# Altium PCB LED Strip Board 2.PcbDoc
Units mil, origin at the board's own origin, x right, y up, seen from the top; angles counter-clockwise.
Board outline 4495.54 x 2410.41 mil, 2 copper layers (Top Layer, Bottom Layer); 44 components, 40 nets, 148 pads, 28 vias.
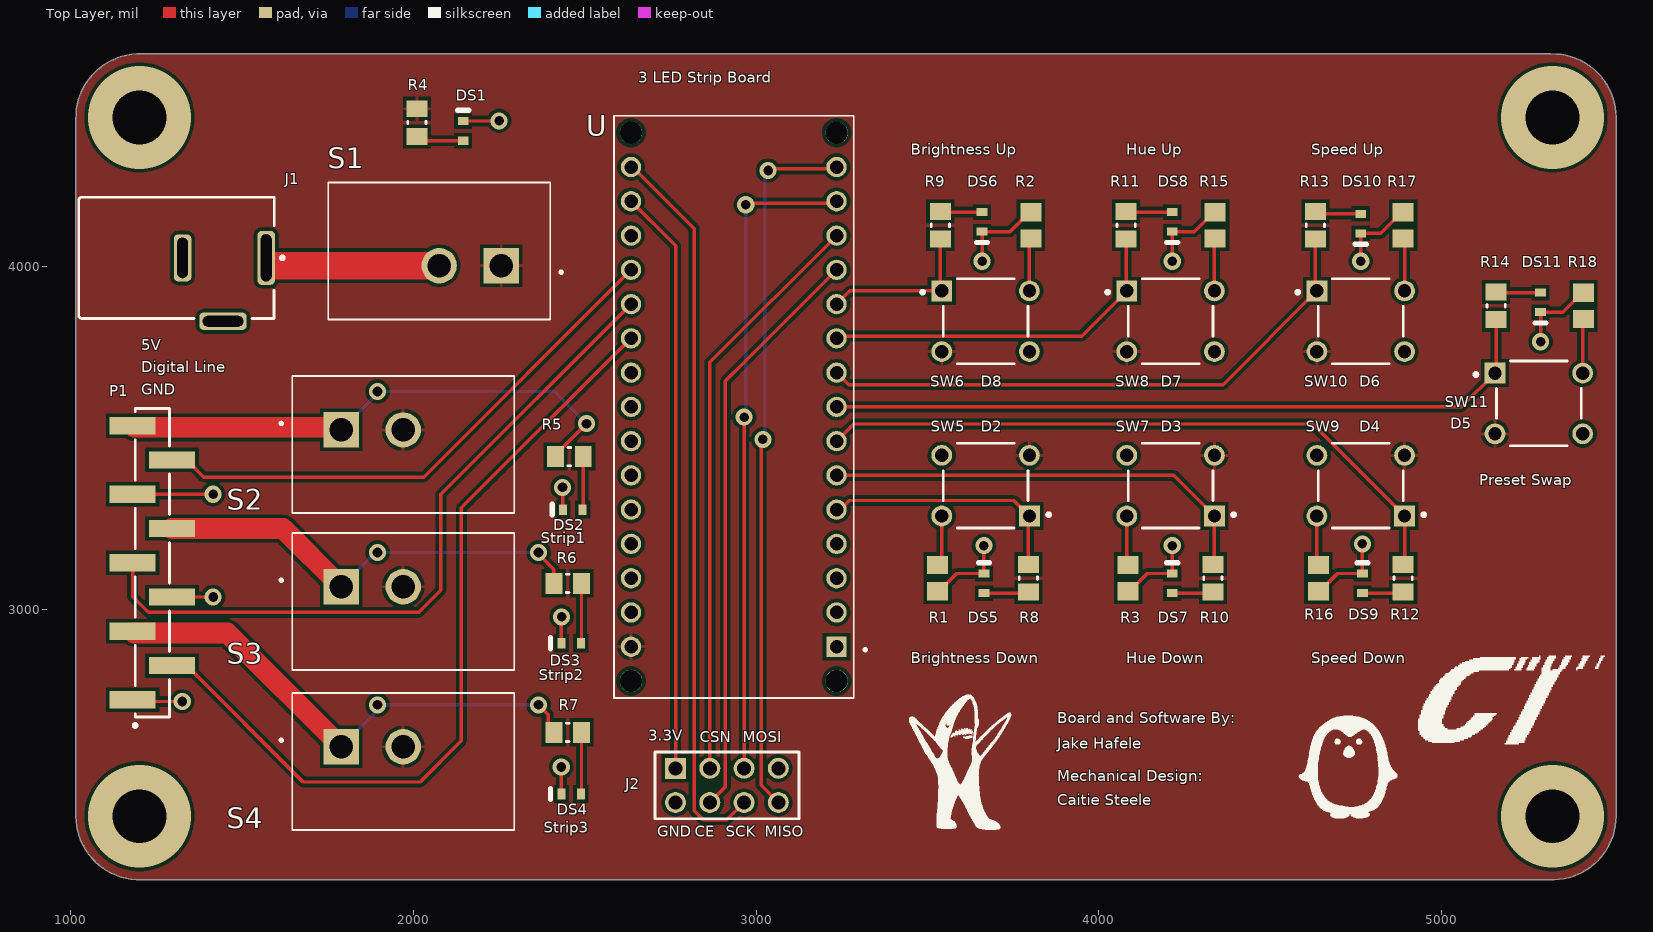
[diagram p0: Top Layer view]
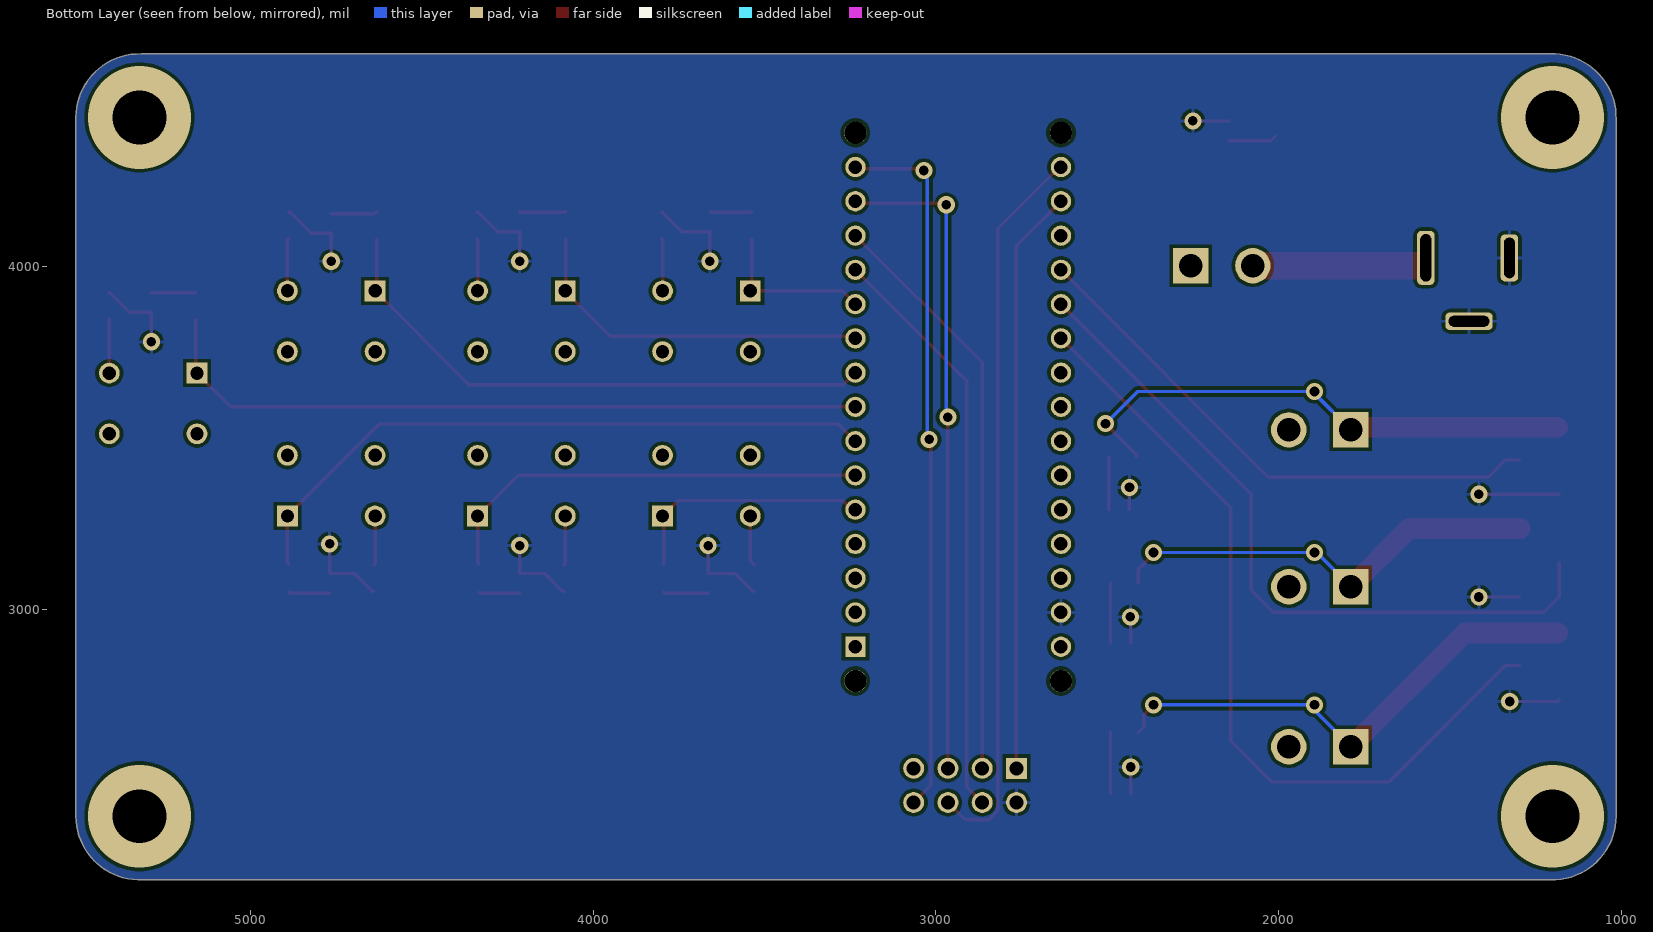
[diagram p1: Bottom Layer view, seen from below]

## Layer stack, top to bottom
Top Solder: solder mask 0.4, Solder Resist, Dk 3.5
Top Layer: signal copper 1.4
Dielectric 1: dielectric 12.6, FR-4, Dk 4.8
Bottom Layer: signal copper 1.4
Bottom Solder: solder mask 0.4, Solder Resist, Dk 3.5

## Board outline
1205.01,2209.8 cw(c1200,2395) 1014.73,2395 1014.73,4429.63 1014.81,4429.71 cw(c1200,4435) 1206.17,4620.17 1206.21,4620.2 5319.99,4620.2 cw(c5325,4435) 5510.27,4435 5510.27,2395 cw(c5325,2395) 5330.29,2209.81

## Design rules (kind name [scope] priority, off if disabled: settings)
Clearance [All] p1: gap=10 ignorepadtopadclearanceinfootprint=FALSE except(0: Arc-Hole Track-Hole SMDPad-Hole THPad-Hole Via-Hole Fill-Hole Poly-Hole Region-Hole Text-Hole)
PolygonConnect [All] p1: connectstyle=Relief reliefconductorwidth=10 reliefentries=4 polygonreliefangle="90 Angle" airgapwidth=10
RoutingVias [All] p1: holewidth=28 width=50 viastyle="Through Hole" minholewidth=28 minwidth=50 maxholewidth=28 maxwidth=50
SolderMaskExpansion [All] p1: expansion=4 istentingtop=FALSE
Width [All] p1: maxlimit=10 minlimit=10 preferedwidth=10
30 further rules are at their usual default settings.

## Components (designator, comment, footprint, x,y, rotation, side; value= is the part's Value field where it differs from the comment)
DS1 "Red LED" VISH-TLMS1000_V 2145,4395.39 r90 top
DS2 "Red" VISH-TLMS1000_V 2465,3290 r180 top
DS3 "Red" VISH-TLMS1000_V 2460,2900 r180 top
DS4 "Red" VISH-TLMS1000_V 2460,2460 r180 top
DS5 "Red LED" VISH-TLMS1000_V 3665,3075 r90 top
DS6 "Red LED" VISH-TLMS1000_V 3659.11,4130 r270 top
DS7 "Red LED" VISH-TLMS1000_V 4215,3075 r90 top
DS8 "Red LED" VISH-TLMS1000_V 4215,4130 r270 top
DS9 "Red LED" VISH-TLMS1000_V 4770,3075 r90 top
DS10 "Red LED" VISH-TLMS1000_V 4765,4125 r270 top
DS11 "Red LED" VISH-TLMS1000_V 5290,3895 r270 top
J1 "KLDX-0202-A" KYCN-KLDX-0202-A_V 1325.91,4025 r180 top
J2 "NRF24l01 Connect" SMTC-SSW-104-01-X-D 2765,2535 r0 top
P1 "LED Strip Connectors" SMTC-TSM-109-01-X-SV 1237.52,3135 r90 top
R1 "10k" RESC2013X70X40ML20T20 3530,3090 r270 top
R2 "10k" RESC2013X70X40ML20T20 3802.15,4120 r90 top
R3 "10k" RESC2013X70X40ML20T20 4086.24,3090 r270 top
R4 "1k" RESC2013X60X30ML20T20 2010,4420 r90 top
R5 "1k" RESC2013X60X30ML20T20 2455.02,3445 r180 top
R6 "1k" RESC2013X60X30ML20T20 2450.02,3075 r180 top
R7 "1k" RESC2013X60X30ML20T20 2450.02,2640 r180 top
R8 "1k" RESC2013X60X30ML20T20 3795,3090 r90 top
R9 "1k" RESC2013X60X30ML20T20 3537.85,4120 r270 top
R10 "1k" RESC2013X60X30ML20T20 4333.76,3090 r90 top
R11 "1k" RESC2013X60X30ML20T20 4080,4120 r270 top
R12 "1k" RESC2013X60X30ML20T20 4888.76,3090 r90 top
R13 "1k" RESC2013X60X30ML20T20 4632.85,4120 r270 top
R14 "1k" RESC2013X60X30ML20T20 5160,3885 r270 top
R15 "10k" RESC2013X70X40ML20T20 4340,4120 r90 top
R16 "10k" RESC2013X70X40ML20T20 4641.24,3090 r270 top
R17 "10k" RESC2013X70X40ML20T20 4888.76,4120 r90 top
R18 "10k" RESC2013X70X40ML20T20 5415,3885 r90 top
S1 "GF-123-0054" SW_GF-123-0054 2075,4045 r180 top
S2 "GF-123-0054" SW_GF-123-0054 1970,3480 r0 top
S3 "GF-123-0054" SW_GF-123-0054 1970,3022.09 r0 top
S4 "GF-123-0054" SW_GF-123-0054 1970,2555 r0 top
SW5 "Button" FP-1825910-2-0 3670,3360 r180 top
SW6 "Button" FP-1825910-2-0 3670,3840 r0 top
SW7 "Button" FP-1825910-2-0 4210,3360 r180 top
SW8 "Button" FP-1825910-2-0 4210,3840 r0 top
SW9 "Button" FP-1825910-2-0 4765,3360 r180 top
SW10 "Button" FP-1825910-2-0 4765,3840 r0 top
SW11 "Button" FP-1825910-2-0 5285,3600 r0 top
U "A000005" MODULE_A000005 2935,3590 r180 top

## Footprints (in the part's own frame and the unit in brackets; to place one, negate y for a bottom-side part, rotate by r counter-clockwise, add the part's x,y. Pads: shape width x height; smd on the part's side, far side on the other; paste and mask are expansions set on the pad)
FP-1825910-2-0 [mm]
  rect 1.54x1.54 hole 0.99 paste-1000 mask+0: 1(-3.25,2.25)
  round 1.54 hole 0.99 paste-1000 mask+0: 2(3.25,2.25) 3(-3.25,-2.25) 4(3.25,-2.25)
  silkscreen extent -4.8,-3.15 3.15,3.15, body extent -4.12,-3.24 4.12,3.24, height 0.25
KYCN-KLDX-0202-A_V [mm] "Power Jack, 3-Leads, Body 14.5x9mm"
  rrect50% 1.3x4 hole 0.8 slot 3.5 at 90 deg: 1(-6.2,0)
  rrect50% 1.3x3.5 hole 0.8 slot 3 at 90 deg: 2(0,0)
  rrect50% 3.5x1.3 hole 0.8 slot 3 at 0 deg: 3(-3,4.7)
  silkscreen extent -7.53,-4.5 7.7,4.5, body extent -6.8,-4.5 7.7,4.9, height 10.8
MODULE_A000005 [mm]
  rect 1.508x1.508 hole 1: 1(-7.62,17.78)
  round 1.508 hole 1: 2(-7.62,15.24) 3(-7.62,12.7) 4(-7.62,10.16) 5(-7.62,7.62) 6(-7.62,5.08) 7(-7.62,2.54) 8(-7.62,0) 9(-7.62,-2.54) 10(-7.62,-5.08) 11(-7.62,-7.62) 12(-7.62,-10.16) 13(-7.62,-12.7) 14(-7.62,-15.24) 15(-7.62,-17.78) 16(7.62,-17.78) 17(7.62,-15.24) 18(7.62,-12.7) 19(7.62,-10.16) 20(7.62,-7.62) 21(7.62,-5.08) 22(7.62,-2.54) 23(7.62,0) 24(7.62,2.54) 25(7.62,5.08) 26(7.62,7.62) 27(7.62,10.16) 28(7.62,12.7) 29(7.62,15.24) 30(7.62,17.78)
  round 1.651 hole 1.651 unplated: ""(-7.62,20.32) ""(-7.62,-20.32) ""(7.62,20.32) ""(7.62,-20.32)
  silkscreen extent -9.85,-21.59 8.89,21.59
RESC2013X60X30ML20T20 [mm] "Chip Resistor, 2-Leads, Body 2.00x1.25mm, IPC Low Density"
  rect 1.25x1.55 smd: 1(-1.025,0) 2(1.025,0)
  silkscreen extent -0.1,-0.67 0.1,0.67, body extent -1.1,-0.72 1.1,0.72, height 0.6
RESC2013X70X40ML20T20 [mm] "Chip Resistor, 2-Leads, Body 2.00x1.25mm, IPC Low Density"
  rect 1.35x1.55 smd: 1(-0.975,0) 2(0.975,0)
  body extent -1.1,-0.72 1.1,0.72, height 0.7
SMTC-SSW-104-01-X-D [mm] "SQ Post Socket, 2x4 Pins, Vertical, 2.54mm Pitch, Female"
  rect 1.55x1.55 hole 1.04: 1(0,0)
  round 1.55 hole 1.04: 2(0,-2.54) 3(2.54,0) 4(2.54,-2.54) 5(5.08,0) 6(5.08,-2.54) 7(7.62,0) 8(7.62,-2.54)
  silkscreen extent -1.53,-3.74 9.15,1.2, body extent -1.52,-3.75 9.14,1.21, height 8.51
SMTC-TSM-109-01-X-SV [mm] "Single Row SMT Assembly, 9 Pins, Vertical, 2.54mm Pitch, Male"
  rect 1.27x3.43 smd: 1(-10.16,1.46) 2(-7.62,-1.46) 3(-5.08,1.46) 4(-2.54,-1.46) 5(0,1.46) 6(2.54,-1.46) 7(5.08,1.46) 8(7.62,-1.46) 9(10.16,1.46)
  silkscreen extent -12.19,-1.27 11.43,1.4, body extent -11.43,-2.64 11.43,2.64, height 9.65
SW_GF-123-0054 [mm]
  rect 2.625x2.625 hole 1.75: 1(-4.6,1.09)
  round 2.625 hole 1.75: 2(0,1.09)
  silkscreen extent -9.14,-5.08 8.23,5.08, body extent -8.23,-5.08 8.23,5.08, height 14.96
VISH-TLMS1000_V [mm] "SMD, 2-Leads, Body 0.8x1.6mm"
  rect 0.6x0.8 smd: 1(-0.725,0) 2(0.725,0)
  silkscreen extent 1.52,-0.4 1.52,0.4, body extent -0.8,-0.4 0.8,0.4, height 0.65

## Part data
DS1 DS5 DS6 DS7 DS8 DS9 DS10 DS11: library part CMP-2000-07254-1, "Low Current LED, 40 mW, 1.8 V, -40 to 100 degC, 2-Pin SMD (0603), RoHS, Tape and Reel", Forward Current If=2mA, Forward Voltage=1.8V, LED Colour=Red, Manufacturer=Vishay, Package Description="2-Pin Surface Mount Device, Body 1.6 x 0.8 mm", Package Reference=TLMS1000, Automotive Qualification Standard=AEC-Q100, Bulb Size=1.6mmx0.8mm, Datasheet URL=https://datasheet.ciiva.com/5798/1698881-5798337.pdf, Datasheet Version="Rev. 1.7, 02/2011", LED Mounting=SMD, Lens Shape=Rectangular, Luminous Intensity=4mcd, Manufacturer URL=http://www.vishay.com/, Mounting Technology=SurfaceMount, MSL=MSL2-1year, Packaging=CutTape, Product Range=-, SVHC=ToBeAdvised, Viewing Angle=80°, Wavelength Typ=636nm
DS2 DS3 DS4: library part CMP-2000-07254-1, "Low Current LED, 40 mW, 1.8 V, -40 to 100 degC, 2-Pin SMD (0603), RoHS, Tape and Reel", Forward Current If=2mA, Forward Voltage=1.8V, Manufacturer=Vishay, Package Description="2-Pin Surface Mount Device, Body 1.6 x 0.8 mm", Package Reference=TLMS1000, Automotive Qualification Standard=AEC-Q100, Bulb Size=1.6mmx0.8mm, Datasheet URL=https://datasheet.ciiva.com/5798/1698881-5798337.pdf, Datasheet Version="Rev. 1.7, 02/2011", LED Colour=Red, LED Mounting=SMD, Lens Shape=Rectangular, Luminous Intensity=4mcd, Manufacturer URL=http://www.vishay.com/, Mounting Technology=SurfaceMount, MSL=MSL2-1year, Packaging=CutTape, Product Range=-, SVHC=ToBeAdvised, Viewing Angle=80°, Wavelength Typ=636nm
J1: library part CMP-1673-00001-5, "DC Power Jack, 24 V, 3.5 A, -25 to 85 degC, 3-Pin THD, RoHS", Colour=Black, Current Rating="3.5 A", Manufacturer=Kycon, Max Operating Temperature="85 degC", Min Operating Temperature="-25 degC", Package Quantity=500, Voltage Rating="24 V", ComponentLink1Description="Manufacturer URL", ComponentLink1URL=http://www.kycon.com/, ComponentLink2Description=Datasheet, ComponentLink2URL=http://www.kycon.com/Pub_Eng_Draw/KLDX-0202-X.PDF, Connector Type=Power, Contact Gender=Female, Contact Material=Brass, Contact Plating=Tin, DatasheetVersion="Rev. D3, 06/2013", Height="10.8 mm", Housing Material=PBT, Length="9.2 mm", Mount="Through Hole", Mounting Technology="Through Hole", PackageDescription="3-Pin Through Hole Device, Body 14.5 x 9 mm", PackageReference=KLDX-0202-A, Pins=2, RoHSCompliant=true
J2: library part CMP-1023-00339-1, "SQ Post Socket, Through-hole, Vertical, -55 to 105 degC, 2.54mm Pitch, 8-Pin, Female, RoHS", Manufacturer=Samtec, PartNumber=SSW-104-01-T-D, Temperature Range="-55 to 105 degC", ComponentLink1Description="Manufacturer URL", ComponentLink1URL=http://www.samtec.com, ComponentLink2Description=Datasheet, ComponentLink2URL=http://www.samtec.com/documents/webfiles/pdf/SSW_TH.PDF, ComponentLink3Description="Package Specification", ComponentLink3URL=http://www.samtec.com/documents/webfiles/cpdf/SSW-1XX-XX-XXX-X-XX-XXX-XX-MKT.pdf, DatasheetVersion=F-214, Mounting Technology=Through-hole, Orientation=Vertical, PackageDescription="Assembly, Socket Strip .016 X .031 Tail", PackageReference=SSW-104-01-X-D, PackageVersion="CA, 6/1987", Pitch="2.54 mm", RoHS=True
P1: library part CMP-1024-00281-1, "0.025\" SQ Post Header, Surface Mount, Vertical, -55 to 125 degC, 2.54 mm Pitch, 9-Pin, Male, RoHS", Manufacturer=Samtec, PartNumber=TSM-109-01-L-SV, Temperature Range="-55 to 125 degC", ComponentLink1Description="Manufacturer URL", ComponentLink1URL=http://www.samtec.com, ComponentLink2Description=Datasheet, ComponentLink2URL=http://www.samtec.com/documents/webfiles/pdf/TSM.PDF, ComponentLink3Description="Package Specification", ComponentLink3URL=http://www.samtec.com/documents/webfiles/cpdf/TSM-1XX-XX-XXX-SV-XX-XXX-XX-MKT.pdf, DatasheetVersion=F-214, Mounting Technology="Surface Mount", Orientation=Vertical, PackageDescription="Single Row .100 SMT Assembly", PackageReference=TSM-109-01-X-SV, PackageVersion="BP, 8/2002", Pitch="2.54 mm", RoHS=True
R1 R2 R3 R15 R16 R17 R18: library part CMP-2001-04376-1, Manufacturer=Panasonic, Part Number=ERJ-6ENF1002V
R4 R5 R6 R7 R8 R9 R10 R11 R12 R13 R14: library part CMP-2001-04656-1, Manufacturer="KOA Speer", Part Number=RK73B2ATTD102J
S1 S2 S3 S4: "Slide Switch SPST Through Hole", Package=None, Availability=Good, Check_prices=https://www.snapeda.com/parts/GF-123-0054/CW%20Industries/view-part/2176135/?ref=eda, MF="CW Industries", MP=GF-123-0054, Price=None, Purchase-URL=https://pricing.snapeda.com/search/part/GF-123-0054/?ref=eda, SnapEDA_Link=https://www.snapeda.com/parts/GF-123-0054/CW%20Industries/view-part/2176135/?ref=snap
SW5 SW6 SW7 SW8 SW9 SW10 SW11: library part CMP-03407-000004-1, "SWITCH TACTILE SPST-NO 0.05A 24V", Contact Current Rating=50mA, Contact Resistance=100mΩ, Manufacturer=TE, Manufacturer Part Number=1825910-2, Operating Force=160gf, Package=0, Temperature="-35°C to +85°C", Temperature Range High=+85°C, Temperature Range Low=-35°C, Voltage Rating Dc=24V, Automotive=No, Category=Switch, ComponentLink2Description=Datasheet, ComponentLink2URL=https://www.te.com/commerce/DocumentDelivery/DDEController?Action=showdoc&DocId=Customer+Drawing%7F1825910%7FC10%7Fpdf%7FEnglish%7FENG_CD_1825910_C10.pdf%7F1825910-2, Device Class L1=Electromechanical, Device Class L2=Switches, Device Class L3="Tactile Switches", Digikey Description="SWITCH TACTILE SPST-NO 0.05A 24V", Electromechanical Life=100000Cycles, Height=4.6mm, Lead Free=Yes, Mount="Through Hole", Octopart=https://octopart.com/1825910-2-te+connectivity-42270502, RoHS=TRUE, Throw Configuration=SPST-NO
U: "CLOCK SAW OSCILLATOR SEAM7050 T&", Package=None, Digi-Key_Part_Number=SPA000005J-ND, Digi-Key_Purchase_URL=https://www.digikey.com/product-detail/en/diodes-incorporated/SPA000005J/SPA000005J-ND/9769570?utm_source=snapeda&utm_medium=aggregator&utm_campaign=symbol, MF=Arduino, MP=A000005, SnapEDA_Link=https://www.snapeda.com/parts/A000005/Arduino/view-part/51027/?ref=snap

## Via types
v1: diameter 50, hole 28, Top Layer to Bottom Layer, 24 vias
v2: diameter 300, hole 157, Top Layer to Bottom Layer, 4 vias

## Nets (pads, with @x,y where several pads share a name; then routed paths per layer and width w, separated by ;. In a path a pad name is that pad's centre, name@x,y a point inside that pad or via, vN(x,y) a via of type N, cw(c..) or ccw(c..) an arc to the next point about the centre after c; other vN are vias at no path point)
+3.3: J2.1 U.17 | length 1708.8
  Top Layer w10: U.17 2765,4060 J2.1
+5: R4.2 S1.1 S2.2 S3.2 S4.2 SW5.3 SW6.3 SW7.3 SW8.3 SW9.3 SW10.3 SW11.3 U.30
CE: J2.4 U.12 | length 1708.3
  Top Layer w10: J2.4 2910.51,2480.51 2910.51,3665.51 2970,3725 U.12
CSN: J2.3 U.13 | length 1708.3
  Top Layer w10: J2.3 2865,3720 U.13
D2: R8.2 SW5.1 U.5 | length 735.1
  Top Layer w10: U.5 3244.73,3290 3271.46,3316.73 3752.64,3316.73 SW5.1 3795,3268.46 R8.2
D3: R10.2 SW7.1 U.6 | length 1294.9
  Top Layer w10: U.6 4219.37,3390 4312.64,3296.73 SW7.1 4337.95,3134.55 R10.2
D4: R12.2 SW9.1 U.7 | length 1932.7
  Top Layer w10: U.7 3285,3540 4624.37,3540 SW9.1 4892.95,3134.55 R12.2
D5: R14.2 SW11.1 U.8 | length 2120.2
  Top Layer w10: U.8 5058.46,3590 5160,3691.54 R14.2
D6: R13.2 SW10.1 U.9 | length 1682.7
  Top Layer w10: U.9 3270,3655 4363.46,3655 SW10.1 4632.85,3932.78 R13.2
D7: R11.2 SW8.1 U.10 | length 1056.4
  Top Layer w10: U.10 3241.73,3796.73 3950.2,3796.73 4056.73,3903.27 SW8.1 4080,3930.63 R11.2
D8: R9.2 SW6.1 U.11 | length 475.8
  Top Layer w10: U.11 3273.58,3928.58 SW6.1 3537.85,3932.78 R9.2
GND: DS1.2 DS2.2 DS3.2 DS4.2 DS5.2 DS6.2 DS7.2 DS8.2 DS9.2 DS10.2 DS11.2 J1.2 J1.3 J2.2 P1.1 P1.4 P1.7 R1.2 R2.2 R3.2 R15.2 R16.2 R17.2 R18.2 U.29 | length 2490.1
  Top Layer w10: P1.1 1185.04,2730 v1(1325,2730) ; P1.7 v1(1415,3335) ; P1.4 v1(1415,3035) ; DS1.2 2145.53,4424.47 2249.47,4424.47 v1(2250,4425) ; v1(2431.27,2538.73) 2431.37,2538.63 2431.37,2460.09 DS4.2 ; DS3.2 2431.83,2900.37 2431.83,2976.83 v1(2432.2,2977.2) ; v1(2435,3355) 2435.73,3354.27 2435.73,3290.73 DS2.2 ; R1.2 3533.94,3051.61 3585.87,3103.54 DS5.2 v1(3665,3185) ; v1(3660,4015) 3660,4100.57 DS6.2 3741.28,4101.46 3798.21,4158.39 R2.2 ; R3.2 4090.18,3051.61 4142.11,3103.54 DS7.2 v1(4215,3185) ; v1(4215,4015) DS8.2 4279.13,4101.46 4336.06,4158.39 R15.2 ; R16.2 4645.18,3051.61 4697.11,3103.54 DS9.2 v1(4770,3190) ; v1(4765,4015) DS10.2 4822.89,4096.46 4884.82,4158.39 R17.2 ; v1(5290,3780) DS11.2 5354.13,3866.46 5411.06,3923.39 R18.2
MISO: J2.8 U.15 | length 2078.1
  Top Layer w10: v1(3020,3495) 3015,3490 3015,2485 J2.8 ; v1(3035,4280) 3040,4285 3230,4285 U.15
  Bottom Layer w10: v1(3020,3495) 3025,3500 3025,3535 3025,4254.14 3027.35,4256.49 3027.35,4272.35 v1(3035,4280)
MOSI: J2.5 U.14 | length 1906.2
  Top Layer w10: J2.5 v1@2965,3550 ; v1(2970,4180) 2975,4185 3230,4185 U.14
  Bottom Layer w10: v1(2965,3560) 2970,3565 v1(2970,4180)
NetDS1_1: DS1.1 R4.1 | length 140.3
  Top Layer w10: R4.1 2022.8,4366.85 DS1.1
NetDS2_1: DS2.1 R5.1 | length 155
  Top Layer w10: DS2.1@2495.38,3290 R5.1
NetDS3_1: DS3.1 R6.1 | length 175
  Top Layer w10: DS3.1@2490.38,2900 R6.1
NetDS4_1: DS4.1 R7.1 | length 180
  Top Layer w10: DS4.1@2490.38,2460 R7.1
NetDS5_1: DS5.1 R8.1 | length 131.3
  Top Layer w10: DS5.1 3791.81,3046.46 R8.1
NetDS6_1: DS6.1 R9.1 | length 122
  Top Layer w10: R9.1 3539.66,4158.54 DS6.1
NetDS7_1: DS7.1 R10.1 | length 120.1
  Top Layer w10: DS7.1 4330.57,3046.46 R10.1
NetDS8_1: DS8.1 R11.1 | length 135.8
  Top Layer w10: R11.1 4081.81,4158.54 DS8.1
NetDS9_1: DS9.1 R12.1 | length 120.1
  Top Layer w10: DS9.1 4885.57,3046.46 R12.1
NetDS10_1: DS10.1 R13.1 | length 135
  Top Layer w10: R13.1 4639.66,4153.54 DS10.1
NetDS11_1: DS11.1 R14.1 | length 130.8
  Top Layer w10: R14.1 5161.81,3923.54 DS11.1
NetJ1_1: J1.1 S1.2 | length 516.2
  Top Layer w10: J1.1 1570,4022.08 J1.1@1590,4002.09
  Top Layer w80: J1.1@1590,4002.09 S1.2
NetP1_3: P1.3 R7.2 S4.1 | length 1483
  Top Layer w10: P1.3 P1.3@1185.04,2930 ; v1(2365,2720) 2393.28,2691.72 2393.28,2656.39 R7.2
  Top Layer w60: P1.3@1185.04,2930 1456.81,2930 S4.1
  Bottom Layer w10: S4.1 1887.35,2696.36 1887.35,2712.35 v1(1895,2720) v1(2365,2720)
NetP1_6: P1.6 R6.2 S3.1 | length 1283.3
  Top Layer w10: v1@2365,3155 2370,3155 2409.67,3115.33 R6.2
  Top Layer w60: P1.6 1618.9,3235 S3.1
  Bottom Layer w10: S3.1 1888.9,3165 v1(1895,3165) v1(2365,3165)
NetP1_9: P1.9 R5.2 S2.1 | length 1549.5
  Top Layer w10: P1.9 P1.9@1185.04,3530 ; R5.2 2414.67,3450.91 v1(2505,3541.24)
  Top Layer w60: P1.9@1185.04,3530 S2.1@1788.9,3530
  Bottom Layer w10: S2.1 1895,3629.02 v1(1895,3635) 2411.24,3635 v1(2505,3541.24)
NetR1_1: R1.1 SW5.2 | length 148
  Top Layer w10: R1.1 3542.05,3140.43 SW5.2
NetR2_1: R2.1 SW6.2 | length 154.8
  Top Layer w10: SW6.2 3797.95,4077.42 R2.1
NetR3_1: R3.1 SW7.2 | length 144.8
  Top Layer w10: SW7.2 4082.05,3132.58 R3.1
NetR15_1: R15.1 SW8.2 | length 153.9
  Top Layer w10: SW8.2 4337.95,4079.57 R15.1
NetR16_1: R16.1 SW9.2 | length 144.8
  Top Layer w10: SW9.2 4637.05,3132.58 R16.1
NetR17_1: R17.1 SW10.2 | length 154.8
  Top Layer w10: R17.1 4892.95,4077.42 SW10.2
NetR18_1: R18.1 SW11.2 | length 158.9
  Top Layer w10: SW11.2 5412.95,3844.57 R18.1
S1: P1.8 U.19 | length 1611.3
  Top Layer w10: P1.8 1337.52,3435 1387.52,3385 2030,3385 U.19
S2: P1.5 U.20 | length 2109.7
  Top Layer w10: P1.5 1180.04,3036.23 1226.27,2990 2015,2990 2080,3055 2080,3335 U.20
S3: P1.2 U.21 | length 2415.6
  Top Layer w10: P1.2 1337.52,2835 1674.59,2497.93 1677.52,2495 2020,2495 2140,2615 2140,3295 U.21
SCK: J2.6 U.16 | length 2135.6
  Top Layer w10: U.16 2640,4290 2819.49,4110.51 2819.49,2410.51 2845,2385 2915,2385 J2.6
pads on no net: J2.7 SW5.4 SW6.4 SW7.4 SW8.4 SW9.4 SW10.4 SW11.4 U. U.1 U.2 U.3 U.4 U.18 U.22 U.23 U.24 U.25 U.26 U.27 U.28
copper on no net:
  other v2: 1200,2395 5325,2395 1200,4435 5325,4435

## Polygon pours and split planes (outlines as drawn)
GND on Bottom Layer "GND_L02_P004" (solid, pour order 4): 5325.27,4620 cw(c5325.27,4435.27) 5510,4435.27 5510,2394.73 cw(c5325.27,2394.73) 5325.27,2210 1199.73,2210 cw(c1199.73,2394.73) 1015,2394.73 1015,4435 cw(c1200,4435) 1200,4620
+5 on Top Layer "+5_L01_P003" (solid, pour order 3): 5325.27,4620 cw(c5325.27,4435.27) 5510,4435.27 5510,2394.73 cw(c5325.27,2394.73) 5325.27,2210 1199.73,2210 cw(c1199.73,2394.73) 1015,2394.73 1015,4435 cw(c1200,4435) 1200,4620

## Silkscreen, mask and mechanical layers (free items; w line width, h text height)
Top Overlay:
  drawing of 3611 lines, arcs and shapes, not listed
  text "In canvas" at 3660,143430 h60
  text "If green, I added demo points in canvas" at 3660,143290 h60
  text "3 LED Strip Board" at 2655.91,4536.4 h31.5
  text "Brightness Up" at 3450.91,4326.4 h31.5
  text "Hue Up" at 4080.91,4326.4 h31.5
  text "Speed Up" at 4620.91,4326.4 h31.5
  text "5V" at 1205.91,3755.91 h31.5
  text "Digital Line" at 1205.91,3691.4 h31.5
  text "D8" at 3655.91,3649.26 h31.5
  text "D7" at 4180.91,3649.26 h31.5
  text "D6" at 4760.91,3649.26 h31.5
  text "GND" at 1205.91,3625.91 h31.5
  text "D5" at 5025.91,3525.91 h31.5
  text "D2" at 3655.91,3518 h31.5
  text "D3" at 4180.91,3518 h31.5
  text "D4" at 4760.91,3518 h31.5
  text "Preset Swap" at 5110.91,3361.4 h31.5
  text "Strip1" at 2370.91,3191.4 h31.5
  text "Brightness Down" at 3450.91,2841.4 h31.5
  text "Hue Down" at 4080.91,2841.4 h31.5
  text "Speed Down" at 4620.91,2841.4 h31.5
  text "Strip2" at 2365.91,2791.4 h31.5
  text "Board and Software By:" at 3879.01,2666.4 h31.5
  text "3.3V" at 2685.91,2615.91 h31.5
  text "CSN" at 2835.91,2610.91 h31.5
  text "MOSI" at 2960.91,2610.91 h31.5
  text "Jake Hafele" at 3879.01,2592.12 h31.5
  text "Mechanical Design:" at 3879.01,2497.61 h31.5
  text "Caitie Steele" at 3879.01,2427.12 h31.5
  text "Strip3" at 2380.91,2346.4 h31.5
  text "GND" at 2710.91,2335.91 h31.5
  text "CE" at 2820.91,2335.91 h31.5
  text "SCK" at 2910.91,2335.91 h31.5
  text "MISO" at 3025.91,2335.91 h31.5
Mechanical 1:
  lines w10: 1014.73,4429.63 1014.73,2395 ccw(c1200,2395) 1205.01,2209.8 5330.29,2209.81 ccw(c5325,2395) 5510.27,2395 5510.27,4435 ccw(c5325,4435) 5319.99,4620.2 1206.21,4620.2 ; 1014.81,4429.71 cw(c1200,4435) 1206.17,4620.17